# EAGLE board 1wire_slave_long (EAGLE 7.7.0)
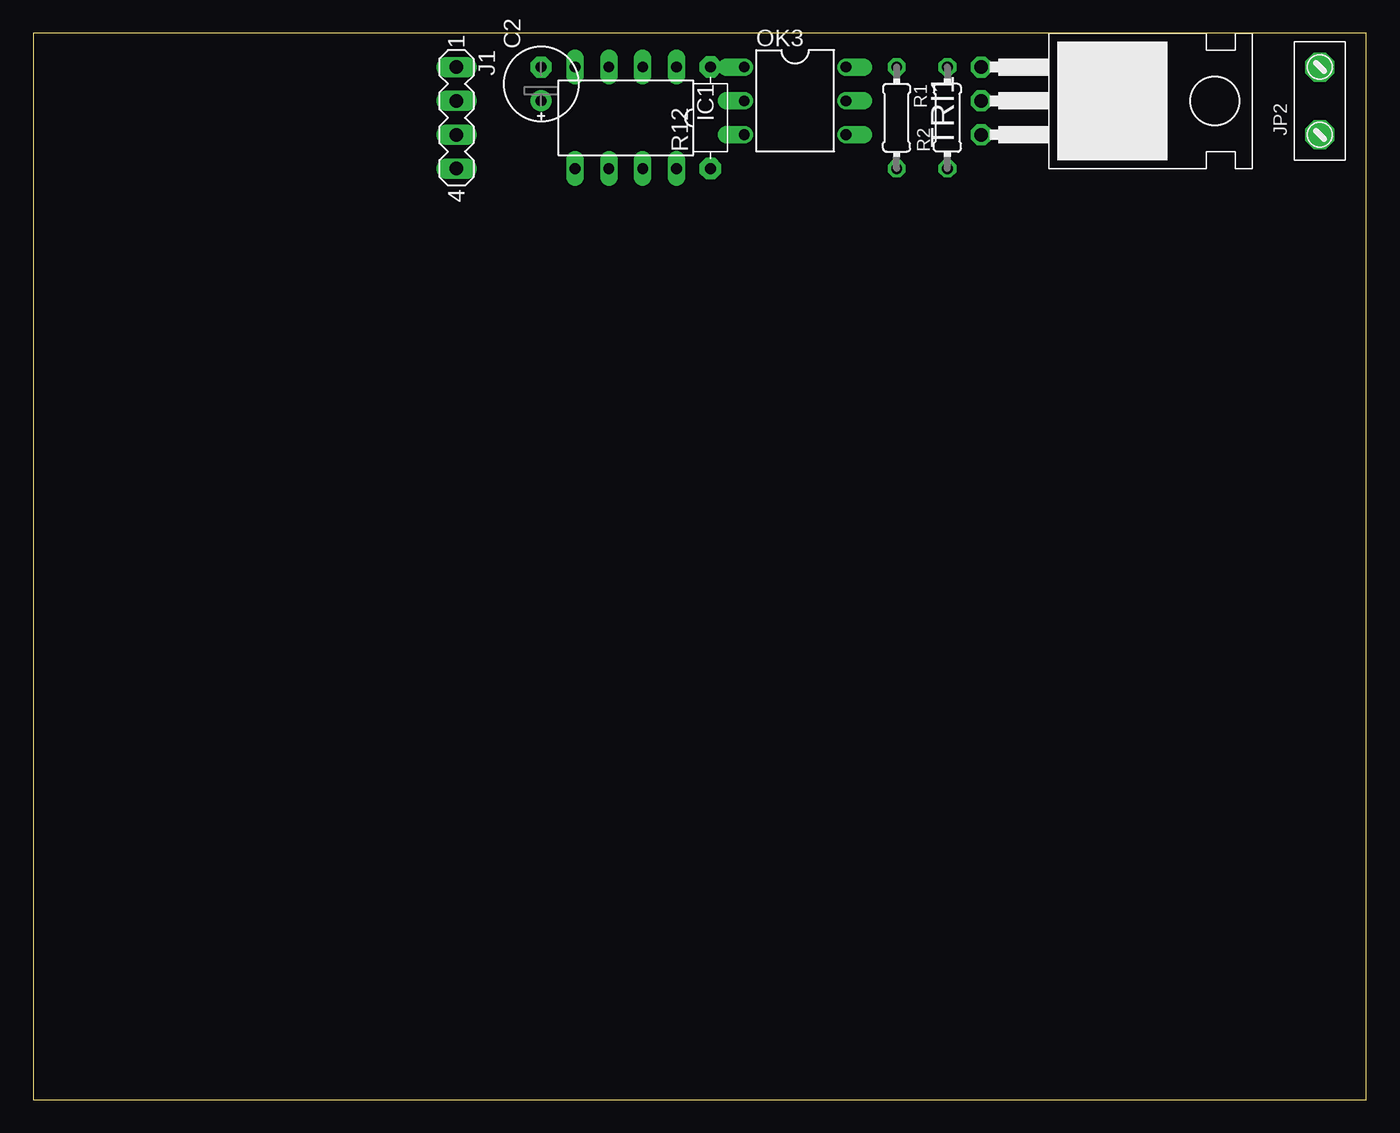
[diagram p0: board, top side]
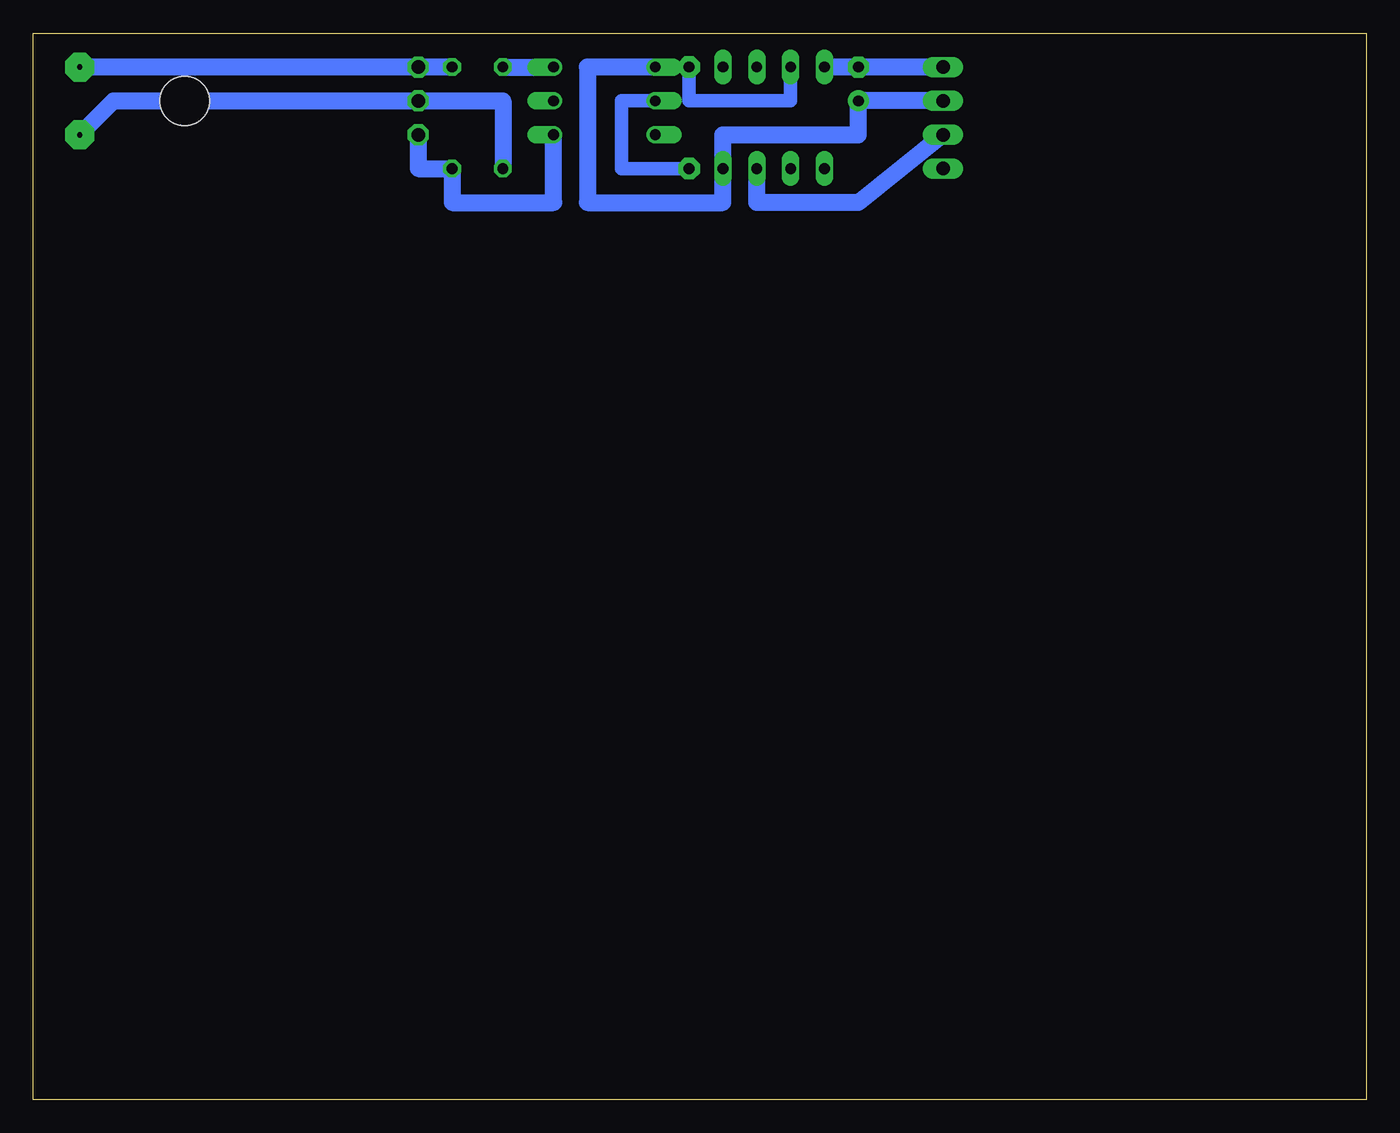
[diagram p1: board, bottom side, seen from below]

Size 100 x 80 mm. Coordinates in mm from the lower left corner, seen from the top.
Outline: 0,0 100,0 100,80 0,80 0,0
Copper layers (1*16): Top 0.035mm / dielectric 1.5mm / Bottom 0.035mm
Design rules "default": minimum track width 10mil, minimum drill 24mil, track to track 8mil, track to pad 8mil, pad to pad 8mil, via to via 8mil, smd to smd 8mil, copper to edge 40mil, drill to drill 8mil, minimum pad ring 10mil, minimum via ring 8mil, stop-mask expansion 4mil, vias tented up to drill 0mil, thermal gap 10mil

## Footprints (pad centres in the part's own frame; a part is rotated, then mirrored left to right if it is on the bottom)
E2,5-6E = drill 0.813 pad 1.575: + -1.27,0 | drill 0.813 pad 1.575 octagon: - 1.27,0
DIL08 = drill 0.813 long: 1 -3.81,-3.81; 2 -1.27,-3.81; 3 1.27,-3.81; 4 3.81,-3.81; 5 3.81,3.81; 6 1.27,3.81; 7 -1.27,3.81; 8 -3.81,3.81
MA04-1 = drill 1.016 long: 1 -3.81,0; 2 -1.27,0; 3 1.27,0; 4 3.81,0
KLEMM2 = drill 0.406 pad 2.184 octagon: 1 -2.54,0; 2 2.54,0
DIL06 = drill 0.813 offset: 1 -2.54,-3.81; 2 0,-3.81; 3 2.54,-3.81; 4 2.54,3.81; 5 0,3.81; 6 -2.54,3.81
0204/7 = drill 0.813 octagon: 1 -3.81,0; 2 3.81,0
R-7,5 = drill 0.813 pad 1.6 octagon: 1 -3.81,0; 2 3.81,0
TO-220A = drill 1.016 pad 1.575 octagon: 1 -2.54,-10.16; 2 0,-10.16; 3 2.54,-10.16 | hole 3.708: 0,7.366

## Placement (x,y rotation side)
C2  1uF  [E2,5-6E]  38.1,76.2 90 top
IC1  TINY22P  [DIL08]  44.45,73.66 180 top
J1  [MA04-1]  31.75,73.66 270 top
JP2  KLEMM2  [KLEMM2]  96.52,74.93 90 top
OK3  MOC3043M  [DIL06]  57.15,74.93 270 top
R1  360  [0204/7]  64.77,73.66 270 top
R2  330  [0204/7]  68.58,73.66 90 top
R12  470k  [R-7,5]  50.8,73.66 90 top
TRI1  TIC226M  [TO-220A]  81.28,74.93 270 top

## Library data of the parts
C2 R1 R2 = resistor
IC1 = atmel; OC_FARNELL: unknown; OC_NEWARK: unknown
J1 = con-lstb; OC_FARNELL: unknown; OC_NEWARK: unknown
JP2 = PINHEAD
OK3 = optocoupler; MF: FAIRCHILD SEMICONDUCTOR; MPN: MOC3043-M; OC_FARNELL: 1021371; OC_NEWARK: 72K8900
R12 = discrete
TRI1 = SEMICON

## Nets
+5V: C2.+ IC1.8 J1.2 OK3.1
GND: C2.- IC1.4 J1.1
N$1: JP2.2 R2.2 TRI1.1
N$3: JP2.1 R1.2 TRI1.2
N$4: IC1.3 R12.2
N$6: OK3.4 R2.1 TRI1.3
N$8: OK3.6 R1.1
N$9: OK3.2 R12.1
OW: IC1.7 J1.3

## Tracks (layer width: path | path; a pad name or v marks a point on that pad's centre or on a via)
+5V
  Bottom 1.27: OK3.1 58.42,77.47 58.42,67.31 48.26,67.31 IC1.8 48.26,72.39 38.1,72.39 C2.+ J1.2
GND
  Bottom 1.27: J1.1 C2.- IC1.4
N$1
  Bottom 1.27: R2.2 TRI1.1 JP2.2
N$3
  Bottom 0.254: 64.92,69.95 R1.2
  Bottom 1.27: JP2.1 93.98,74.93 TRI1.2 64.77,74.93 R1.2
N$4
  Bottom 1.016: IC1.3 43.18,74.93 50.8,74.93 R12.2
N$6
  Bottom 1.27: TRI1.3 71.12,69.85 R2.1 68.58,67.31 60.96,67.31 OK3.4
N$8
  Bottom 1.27: R1.1 OK3.6
N$9
  Bottom 1.016: R12.1 55.88,69.85 55.88,74.93 OK3.2
OW
  Bottom 1.27: J1.3 38.1,67.31 45.72,67.31 IC1.7